# Altium PCB PCB1.PcbDoc
Units mil, origin at the board's own origin, x right, y up, seen from the top; angles counter-clockwise.
Board outline 3937.01 x 3937.01 mil, 2 copper layers (Top Layer, Bottom Layer); 127 components, 79 nets, 406 pads, 54 vias.
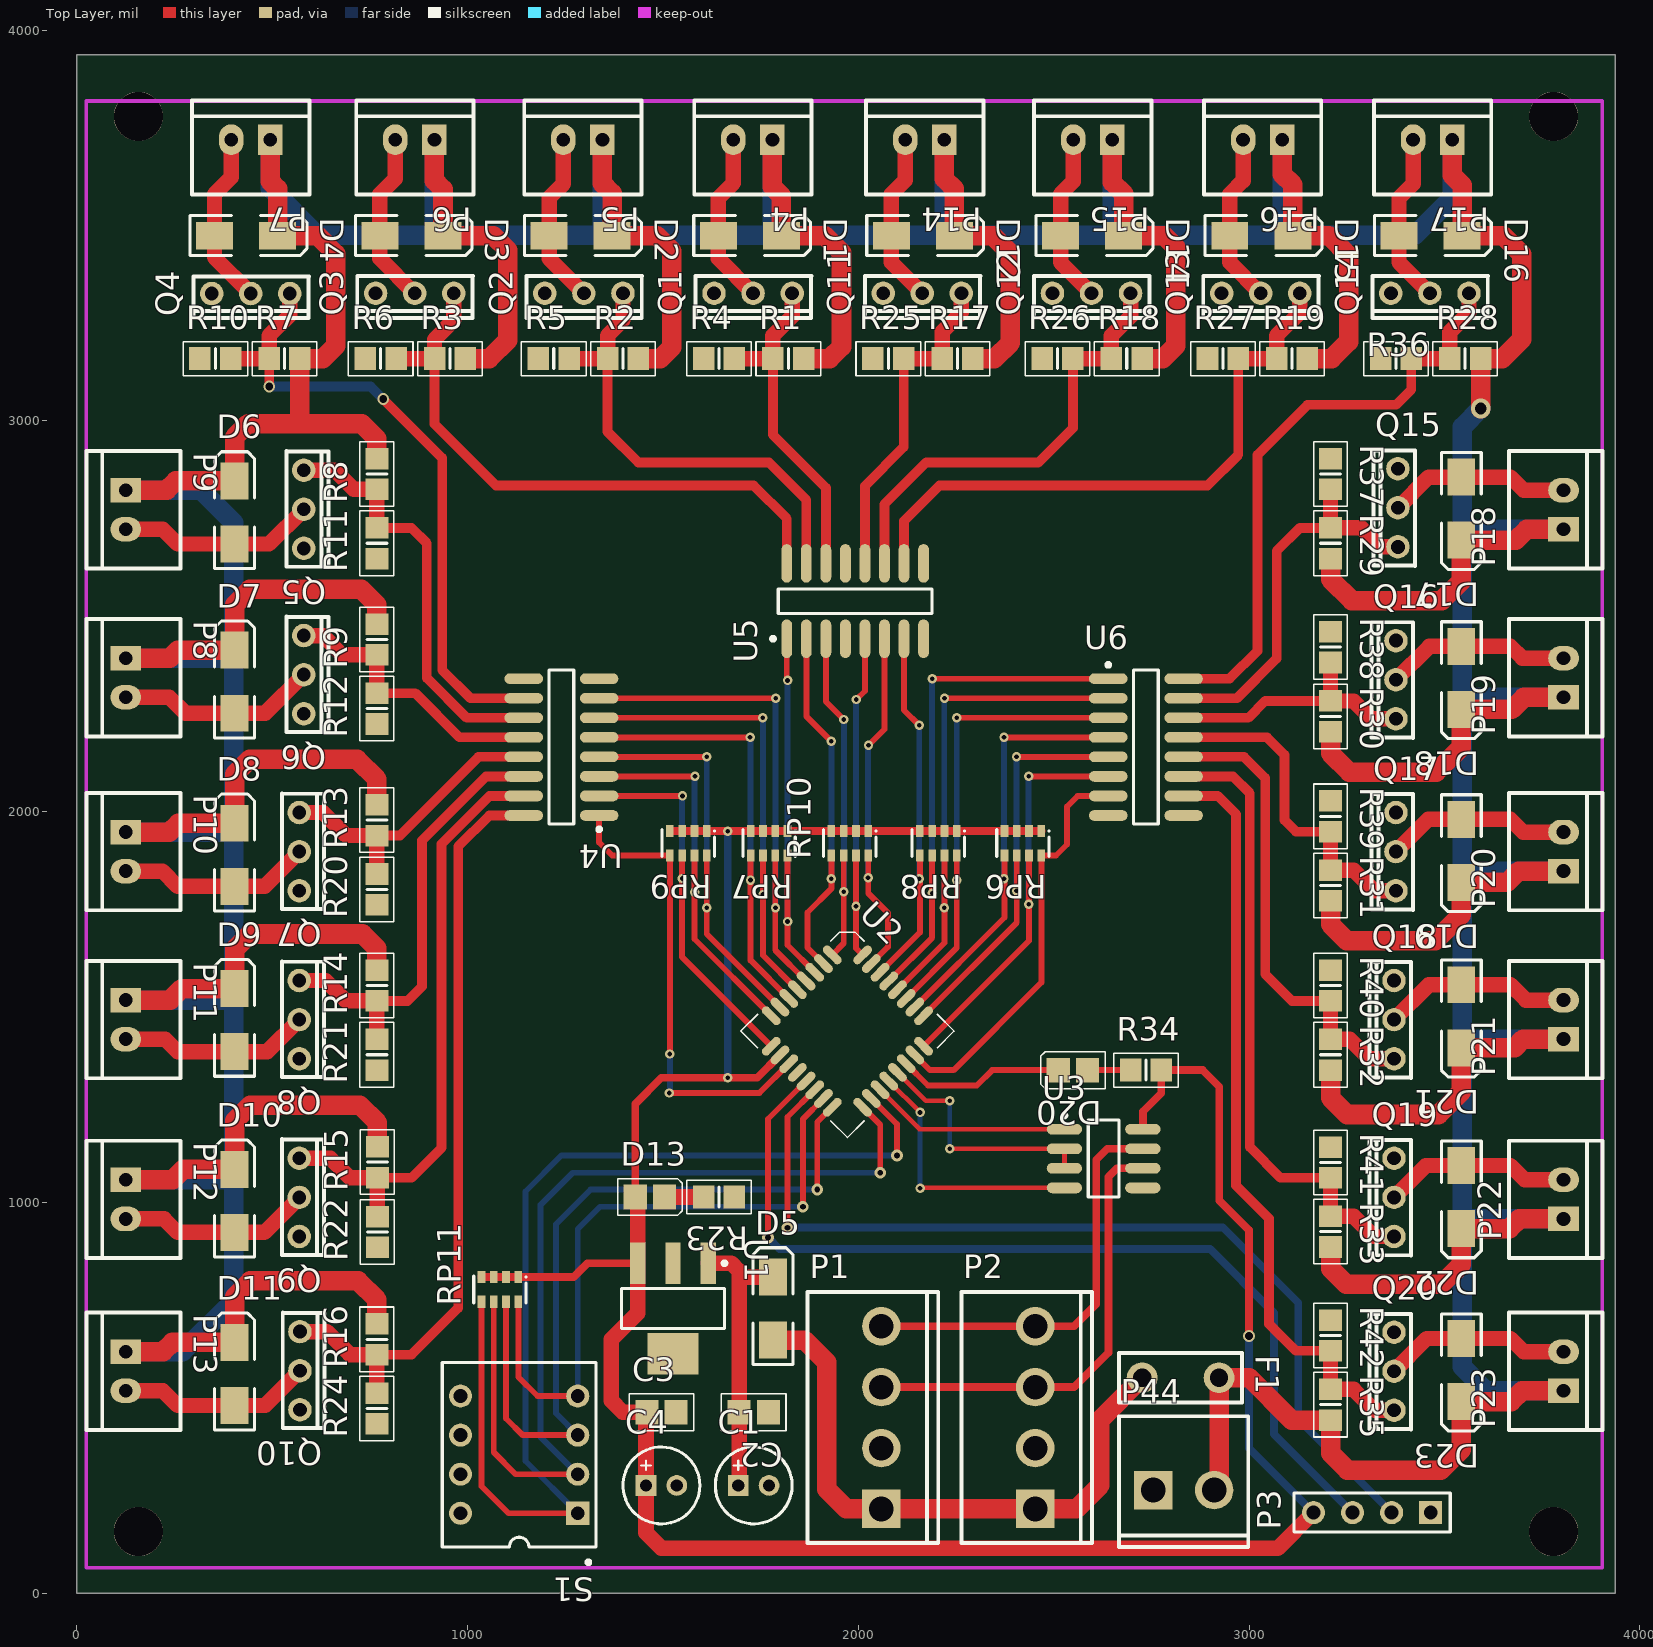
[diagram p0: Top Layer view]
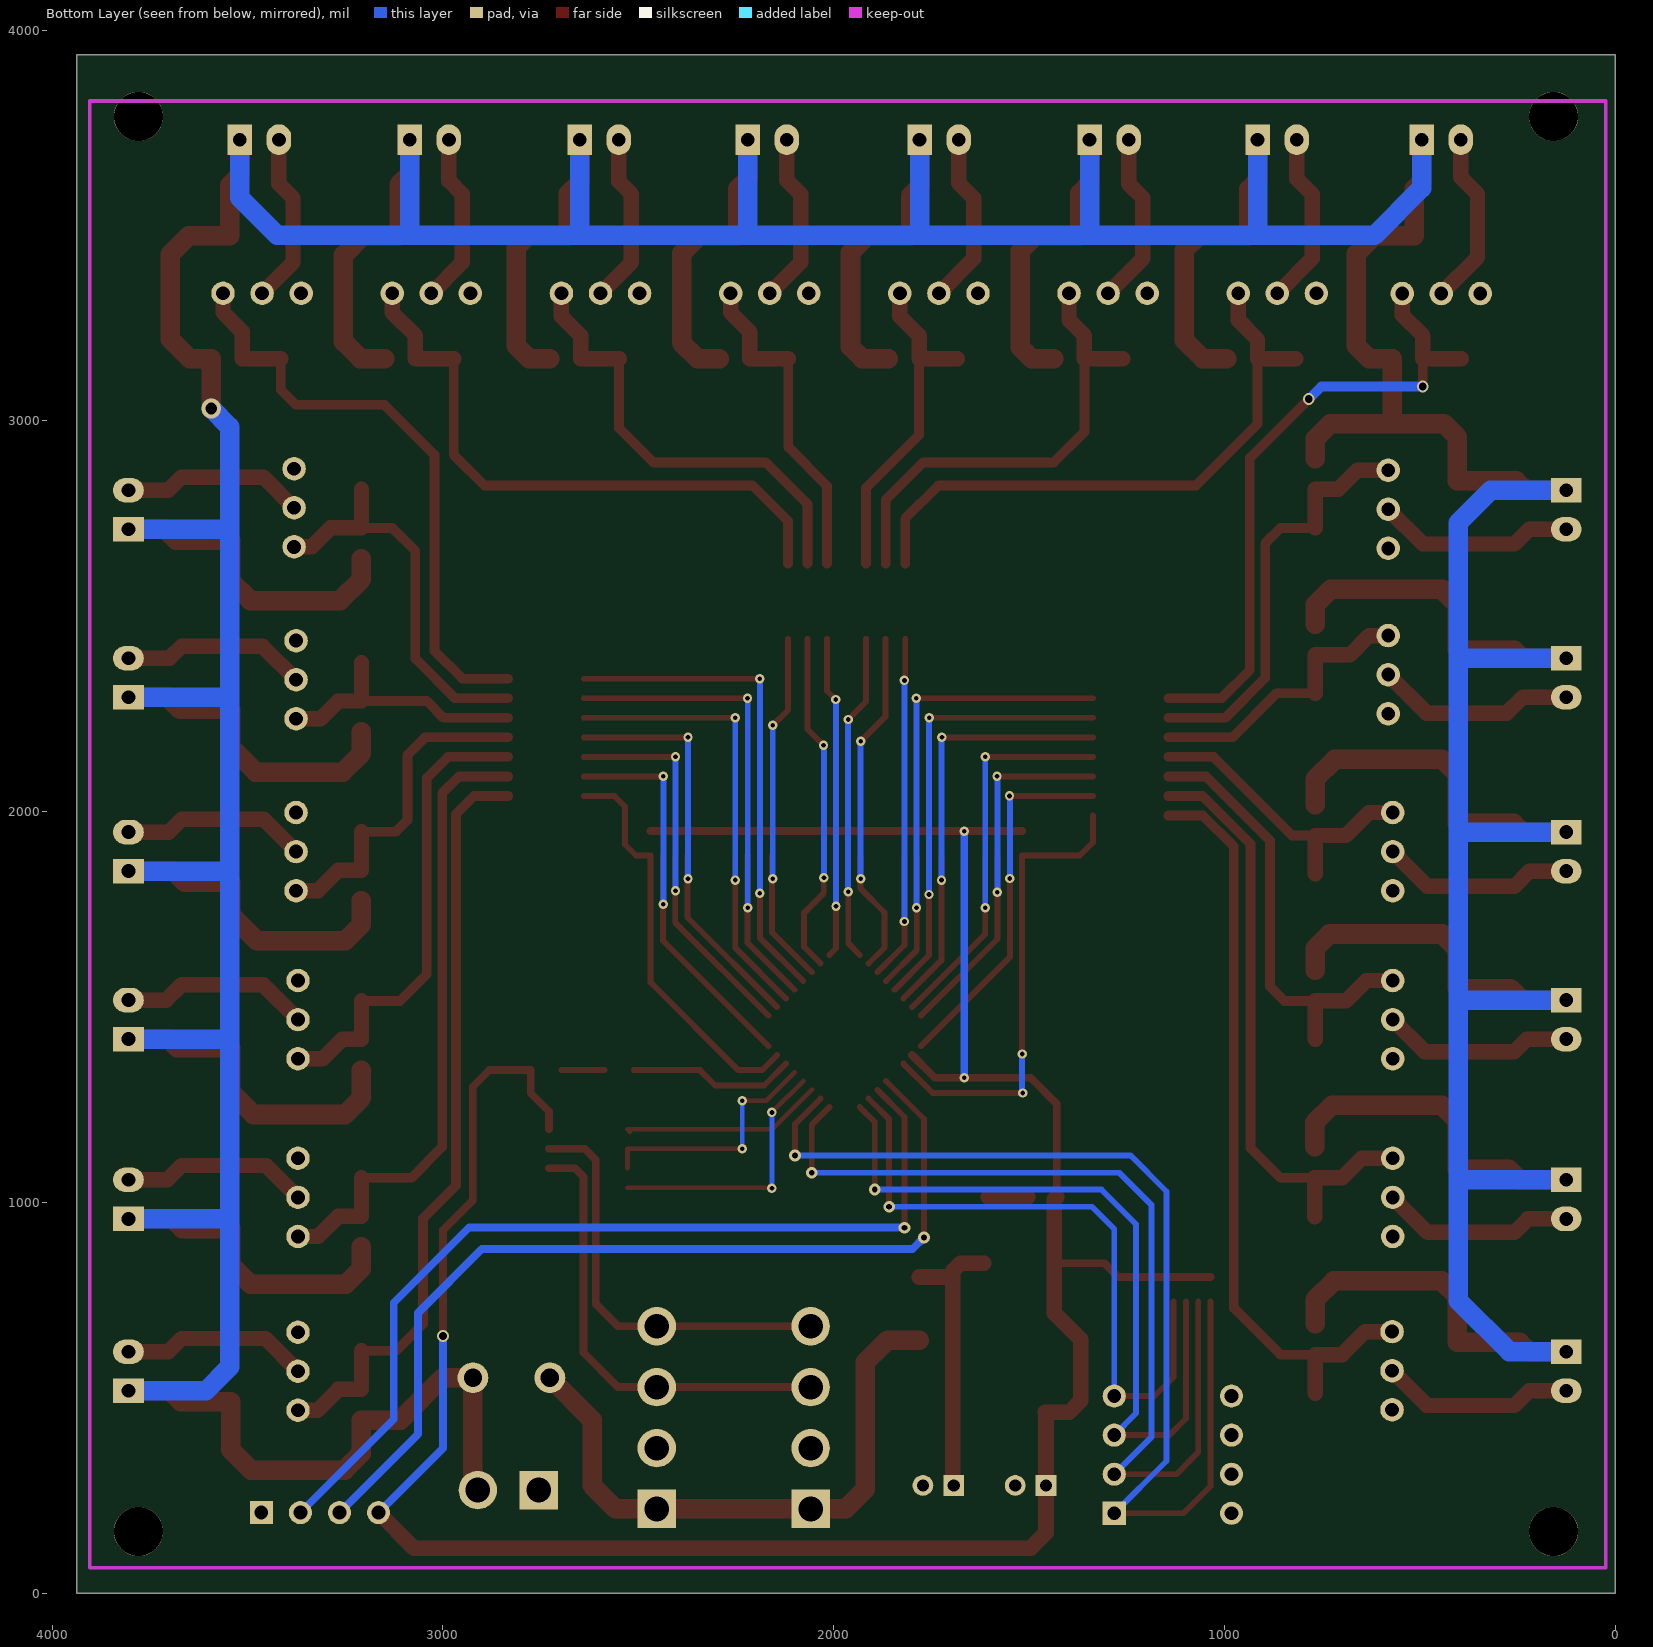
[diagram p1: Bottom Layer view, seen from below]

## Layer stack, top to bottom
Top Solder: solder mask 0.4, Solder Resist, Dk 3.5
Top Layer: signal copper 1.4
Dielectric 1: dielectric 12.6, FR-4, Dk 4.8
Bottom Layer: signal copper 1.4
Bottom Solder: solder mask 0.4, Solder Resist, Dk 3.5

## Board outline
0,0 0,3937.01 3937.01,3937.01 3937.01,0

## Design rules (kind name [scope] priority, off if disabled: settings)
Clearance [All] p1: gap=10
PolygonConnect [All] p1: connectstyle=Relief reliefconductorwidth=10 reliefentries=4 polygonreliefangle="90 Angle" airgapwidth=10
RoutingVias [All] p1: holewidth=28 width=50 viastyle="Through Hole" minholewidth=28 minwidth=50 maxholewidth=28 maxwidth=50
SolderMaskExpansion [All] p1: expansion=4
Width [All] p1: maxlimit=50 minlimit=10 preferedwidth=10
29 further rules are at their usual default settings.

## Components (designator, comment, footprint, x,y, rotation, side; value= is the part's Value field where it differs from the comment)
C1 "Cap Pol2" CAPPR2-5x11.5 1732.28,275.59 r0 top
C2 "0.1uF" CAPC2012M 1732.28,462.6 r180 top
C3 "0.1uF" CAPC2012M 1496.06,462.6 r0 top
C4 "Cap Pol2" CAPPR2-5x11.5 1496.06,275.59 r0 top
D1 "1N4007" DSO-C2/X1.8 1722.44,3474.41 r0 top
D2 "1N4007" DSO-C2/X1.8 1289.37,3474.41 r0 top
D3 "1N4007" DSO-C2/X1.8 856.3,3474.41 r0 top
D4 "1N4007" DSO-C2/X1.8 433.07,3474.41 r0 top
D5 "1N4007" DSO-C2/X1.8 1781.5,728.35 r90 top
D6 "1N4007" DSO-C2/X1.8 403.54,2765.75 r90 top
D7 "1N4007" DSO-C2/X1.8 403.54,2332.68 r90 top
D8 "1N4007" DSO-C2/X1.8 403.54,1889.76 r90 top
D9 "1N4007" DSO-C2/X1.8 403.54,1466.54 r90 top
D10 "1N4007" DSO-C2/X1.8 403.54,1003.94 r90 top
D11 "1N4007" DSO-C2/X1.8 403.54,561.02 r90 top
D12 "1N4007" DSO-C2/X1.8 2165.35,3474.41 r0 top
D13 "LED" LED2012M 1466.54,1013.78 r0 top
D14 "1N4007" DSO-C2/X1.8 2598.43,3474.41 r0 top
D15 "1N4007" DSO-C2/X1.8 3031.5,3474.41 r0 top
D16 "1N4007" DSO-C2/X1.8 3464.57,3474.41 r0 top
D17 "1N4007" DSO-C2/X1.8 3543.31,2775.59 r270 top
D18 "1N4007" DSO-C2/X1.8 3543.31,2342.52 r270 top
D19 "1N4007" DSO-C2/X1.8 3543.31,1899.61 r270 top
D20 "LED" LED2012M 2549.21,1338.58 r180 top
D21 "1N4007" DSO-C2/X1.8 3543.31,1476.38 r270 top
D22 "1N4007" DSO-C2/X1.8 3543.31,1013.78 r270 top
D23 "1N4007" DSO-C2/X1.8 3543.31,570.87 r270 top
F1 "Fuse" SR075 2726.38,551.18 r0 top
P1 "Header 4" VH396-4 2204.72,127.95 r90 top
P2 "Header 4" VH396-4 2598.43,127.95 r90 top
P3 "Header 4" HDR1X4 3465,206 r180 top
P4 "Header 2" XH254-2 1780,3720 r180 top
P5 "Header 2" XH254-2 1345,3720 r180 top
P6 "Header 2" XH254-2 915,3720 r180 top
P7 "Header 2" XH254-2 495,3720 r180 top
P8 "Header 2" XH254-2 125,2392.83 r270 top
P9 "Header 2" XH254-2 125,2822.83 r270 top
P10 "Header 2" XH254-2 125,1947.83 r270 top
P11 "Header 2" XH254-2 125,1517.83 r270 top
P12 "Header 2" XH254-2 125,1057.83 r270 top
P13 "Header 2" XH254-2 125,617.83 r270 top
P14 "Header 2" XH254-2 2220,3720 r180 top
P15 "Header 2" XH254-2 2650,3720 r180 top
P16 "Header 2" XH254-2 3085,3720 r180 top
P17 "Header 2" XH254-2 3520,3720 r180 top
P18 "Header 2" XH254-2 3805,2722.83 r90 top
P19 "Header 2" XH254-2 3805,2292.83 r90 top
P20 "Header 2" XH254-2 3805,1847.83 r90 top
P21 "Header 2" XH254-2 3805,1417.83 r90 top
P22 "Header 2" XH254-2 3805,957.83 r90 top
P23 "Header 2" XH254-2 3805,517.83 r90 top
P44 "Header 2" VH396-2 2667.32,118.11 r0 top
Q1 "NPN" SOT_32 1830.71,3326.77 r180 top
Q2 "NPN" SOT_32 1397.64,3326.77 r180 top
Q3 "NPN" SOT_32 964.57,3326.77 r180 top
Q4 "NPN" SOT_32 545,3326.1 r180 top
Q5 "NPN" SOT_32 580.71,2874.02 r270 top
Q6 "NPN" SOT_32 580.71,2450.79 r270 top
Q7 "NPN" SOT_32 569.21,1997.83 r270 top
Q8 "NPN" SOT_32 569.21,1567.83 r270 top
Q9 "NPN" SOT_32 569.21,1112.83 r270 top
Q10 "NPN" SOT_32 570.87,669.29 r270 top
Q11 "NPN" SOT_32 2263.78,3326.77 r180 top
Q12 "NPN" SOT_32 2696.85,3326.77 r180 top
Q13 "NPN" SOT_32 3129.92,3326.77 r180 top
Q14 "NPN" SOT_32 3562.99,3326.77 r180 top
Q15 "NPN" SOT_32 3381.1,2677.83 r90 top
Q16 "NPN" SOT_32 3376.1,2237.83 r90 top
Q17 "NPN" SOT_32 3376.1,1797.83 r90 top
Q18 "NPN" SOT_32 3371.1,1367.83 r90 top
Q19 "NPN" SOT_32 3371.1,912.83 r90 top
Q20 "NPN" SOT_32 3371.1,467.83 r90 top
R1 "2.2K" RESC2012M 1820.87,3159.45 r0 top
R2 "2.2K" RESC2012M 1397.64,3159.45 r0 top
R3 "2.2K" RESC2012M 954.72,3159.45 r0 top
R4 "100K" RESC2012M 1643.7,3159.45 r0 top
R5 "100K" RESC2012M 1220.47,3159.45 r0 top
R6 "100K" RESC2012M 777.56,3159.45 r0 top
R7 "2.2K" RESC2012M 531.5,3159.45 r0 top
R8 "2.2K" RESC2012M 767.72,2864.17 r90 top
R9 "2.2K" RESC2012M 767.72,2440.94 r90 top
R10 "100K" RESC2012M 354.33,3159.45 r0 top
R11 "100K" RESC2012M 767.72,2687.01 r90 top
R12 "100K" RESC2012M 767.72,2263.78 r90 top
R13 "2.2K" RESC2012M 767.72,1978.35 r90 top
R14 "2.2K" RESC2012M 767.72,1555.12 r90 top
R15 "2.2K" RESC2012M 769,1103 r90 top
R16 "2.2K" RESC2012M 767.72,649.61 r90 top
R17 "2.2K" RESC2012M 2253.94,3159.45 r0 top
R18 "2.2K" RESC2012M 2687.01,3159.45 r0 top
R19 "2.2K" RESC2012M 3110.24,3159.45 r0 top
R20 "100K" RESC2012M 767.72,1801.18 r90 top
R21 "100K" RESC2012M 767.72,1377.95 r90 top
R22 "100K" RESC2012M 769,924 r90 top
R23 "1K" RESC2012M 1643.7,1013.78 r180 top
R24 "100K" RESC2012M 767.72,472.44 r90 top
R25 "100K" RESC2012M 2076.77,3159.45 r0 top
R26 "100K" RESC2012M 2509.84,3159.45 r0 top
R27 "100K" RESC2012M 2933.07,3159.45 r0 top
R28 "2.2K" RESC2012M 3553.15,3159.45 r0 top
R29 "2.2K" RESC2012M 3208.66,2687.01 r270 top
R30 "2.2K" RESC2012M 3208.66,2244.09 r270 top
R31 "2.2K" RESC2012M 3208.66,1811.02 r270 top
R32 "2.2K" RESC2012M 3208.66,1377.95 r270 top
R33 "2.2K" RESC2012M 3208.66,925.2 r270 top
R34 "1K" RESC2012M 2736.22,1338.58 r0 top
R35 "2.2K" RESC2012M 3208.66,482.28 r270 top
R36 "100K" RESC2012M 3375.98,3159.45 r0 top
R37 "100K" RESC2012M 3208.66,2864.17 r270 top
R38 "100K" RESC2012M 3208.66,2421.26 r270 top
R39 "100K" RESC2012M 3208.66,1988.19 r270 top
R40 "100K" RESC2012M 3208.66,1555.12 r270 top
R41 "100K" RESC2012M 3208.66,1102.36 r270 top
R42 "100K" RESC2012M 3208.66,659.45 r270 top
RP6 "10K" EXB38V 2421.26,1919.29 r180 top
RP7 "10K" EXB38V 1771.65,1919.29 r180 top
RP8 "10K" EXB38V 2204.72,1919.29 r180 top
RP9 "10K" EXB38V 1564.96,1919.29 r180 top
RP10 "10K" EXB38V 1978.35,1919.29 r180 top
RP11 "10K" EXB38V 1082.68,777.56 r180 top
S1 "SW DIP-4" SWITCH-8 1131.89,354.33 r180 top
U1 "LM7805" SOT223-4M 1525.59,728.35 r270 top
U2 "STC15W408S_LQFP32" LQFP32 1968.5,1456.69 r315 top
U3 "MAX485ESA" SO8_M 2627.95,1112.2 r0 top
U4 "ULN2003" SO16_M 1240.16,2165.35 r180 top
U5 "ULN2003" SO16_M 1992,2539 r90 top
U6 "ULN2003" SO16_M 2736.22,2165.35 r0 top

## Footprints (in the part's own frame and the unit in brackets; to place one, negate y for a bottom-side part, rotate by r counter-clockwise, add the part's x,y. Pads: shape width x height; smd on the part's side, far side on the other; paste and mask are expansions set on the pad)
CAPC2012M [mm] "Chip Capacitor, Body 2.0x1.3mm, IPC Low Density"
  rect 1.5x1.6 smd: 1(-0.95,0) 2(0.95,0)
  silkscreen extent -2.1,-1.2 2.1,1.2, body extent -1.1,-0.72 1.1,0.72, height 1.1
CAPPR2-5x11.5 [mm] "Capacitor, Electrolytic, Radial; Body 5 x 11.5 mm (Dia.xH typ); Pin Spacing 2 mm (typ)"
  rect 1.35x1.35 hole 0.8: 1(-1,0)
  round 1.35 hole 0.8: 2(1,0)
  silkscreen extent -2.5,-2.5 2.5,2.5
DSO-C2/X1.8 [mm] "DO-214-AC/SMA; 2 C-Bend Leads; Body 5 x 2.7 mm, inc. leads (LxW)"
  rect 2.4x1.8 smd: 1(-2.05,0) 2(2.05,0)
  silkscreen extent -3.65,-1.3 3.95,1.3
EXB38V [mm] "Chip Resistor Array, (0603x4); SM; 8 Leads; Body 3.40 x 1.75 mm (LxW max)"
  rect 0.5x0.8 smd: 1(-1.2,-0.8) 2(-0.4,-0.8) 3(0.4,-0.8) 4(1.2,-0.8) 5(1.2,0.8) 6(0.4,0.8) 7(-0.4,0.8) 8(-1.2,0.8)
  silkscreen extent -1.75,-0.87 1.7,0.87
HDR1X4 [mm] "Connector; Header; 4 Position"
  rect 1.5x1.5 hole 0.9: 1(0,0)
  round 1.5 hole 0.9: 2(2.54,0) 3(5.08,0) 4(7.62,0)
  silkscreen extent -1.27,-1.27 8.89,1.27
LED2012M [mm] "Chip LED, Body 2.0x1.3mm, IPC Low Density"
  rect 1.5x1.6 smd: 1(-0.95,0) 2(0.95,0)
  silkscreen extent -2.1,-1.2 2.1,1.2, body extent -1.1,-0.72 1.1,0.72, height 1.1
LQFP32 [mm]
  oval 1.5x0.55 smd: 1(-3.81,2.54) 2(-3.81,1.74) 3(-3.81,0.94) 4(-3.81,0.14) 5(-3.81,-0.66) 6(-3.81,-1.46) 7(-3.81,-2.26) 8(-3.81,-3.06) 17(4.59,-3.06) 18(4.59,-2.26) 19(4.59,-1.46) 20(4.59,-0.66) 21(4.59,0.14) 22(4.59,0.94) 23(4.59,1.74) 24(4.59,2.54)
  oval 0.55x1.5 smd: 9(-2.41,-4.46) 10(-1.61,-4.46) 11(-0.81,-4.46) 12(-0.01,-4.46) 13(0.79,-4.46) 14(1.59,-4.46) 15(2.39,-4.46) 16(3.19,-4.46) 25(3.19,3.94) 26(2.39,3.94) 27(1.59,3.94) 28(0.79,3.94) 29(-0.01,3.94) 30(-0.81,3.94) 31(-1.61,3.94) 32(-2.41,3.94)
  silkscreen extent -4.51,-5.16 5.29,4.64
RESC2012M [mm] "Chip Resistor, Body 2.0x1.3mm, IPC Low Density"
  rect 1.4x1.5 smd: 1(-1,0) 2(1,0)
  silkscreen extent -2.1,-1.1 2.1,1.1, body extent -1.07,-0.7 1.07,0.7, height 0.65
SO8_M [mm] "SOIC, 8-Leads, Body 4.9x3.9mm, Pitch 1.27mm, IPC Low Density"
  oval 2.3x0.7 smd: 1(-2.55,1.905) 2(-2.55,0.635) 3(-2.55,-0.635) 4(-2.55,-1.905) 5(2.55,-1.905) 6(2.55,-0.635) 7(2.55,0.635) 8(2.55,1.905)
  silkscreen extent -2.67,-2.5 1,2.93, body extent -2,-2.5 2,2.5, height 1.75
SO16_M [mm] "SOIC, 16-Leads, Body 9.9x3.9mm, Pitch 1.27mm, IPC Low Density"
  oval 2.5x0.7 smd: 1(-2.45,4.445) 2(-2.45,3.175) 3(-2.45,1.905) 4(-2.45,0.635) 5(-2.45,-0.635) 6(-2.45,-1.905) 7(-2.45,-3.175) 8(-2.45,-4.445) 9(2.45,-4.445) 10(2.45,-3.175) 11(2.45,-1.905) 12(2.45,-0.635) 13(2.45,0.635) 14(2.45,1.905) 15(2.45,3.175) 16(2.45,4.445)
  silkscreen extent -2.58,-5 0.8,5.47, body extent -2,-5 2,5, height 1.75
SOT223-4M [mm] "SOT223/SC73, 4-Leads, Body 6.5x3.5mm, Pitch 2.3mm, Lead Span 7mm, IPC Low Density"
  rect 2.7x1 smd: 1(-2.95,2.3) 2(-2.95,0) 3(-2.95,-2.3)
  rect 2.7x3.3 smd: 4(2.95,0)
  silkscreen extent -3.07,-3.35 1.3,3.48, body extent -1.85,-3.35 1.85,3.35, height 1.8
SOT_32 [mil]
  round 60 hole 35.43: 1(0,0) 2(200,0) 3(100,0)
  silkscreen extent -49,-44 247,63
SR075 [mm]
  round 2 hole 1.2: 1(0,0) 2(5,0)
  silkscreen extent -1.5,-1.6 6.5,1.6
SWITCH-8 [mm] "DIP; 8 Leads; Row Spacing 7.62 mm; Pitch 2.54 mm"
  rect 1.5x1.5 hole 0.9: 1(-3.81,3.81)
  round 1.5 hole 0.9: 2(-3.81,1.27) 3(-3.81,-1.27) 4(-3.81,-3.81) 5(3.81,-3.81) 6(3.81,-1.27) 7(3.81,1.27) 8(3.81,3.81)
  silkscreen extent -5,-6 5,7.12, body extent -5,-6 5,6, height 6.2
VH396-2 [mm]
  rect 2.5x2.5 hole 1.6: 1(2.22,3.7)
  round 2.5 hole 1.6: 2(6.18,3.7)
  silkscreen extent 0,0 8.4,8.5
VH396-4 [mm]
  rect 2.5x2.5 hole 1.6: 1(2.22,3.7)
  round 2.5 hole 1.6: 2(6.18,3.7) 3(10.14,3.7) 4(14.1,3.7)
  silkscreen extent 0,0 16.32,8.5
XH254-2 [mm]
  rect 1.6x2 hole 0.9: 1(0,0)
  oval 1.6x2 hole 0.9: 2(2.54,0)
  silkscreen extent -2.54,-2.54 5.08,3.56

## Part data
C1 C4: "Polarized Capacitor (22uf-47uf)"
C2 C3: library part Cap, "Capacitor"
D1 D2 D3 D4 D5 D6 D7 D8 D9 D10 D11 D12 D14 D15 D16 D17 D18 D19 D21 D22 D23: library part Diode, "Default Diode"
D13 D20: "Typical INFRARED GaAs LED"
P1 P2 P3: "Header, 4-Pin"
P4 P5 P6 P7 P8 P9 P10 P11 P12 P13 P14 P15 P16 P17 P18 P19 P20 P21 P22 P23 P44: "Header, 2-Pin"
Q1 Q2 Q3 Q4 Q5 Q6 Q7 Q8 Q9 Q10 Q11 Q12 Q13 Q14 Q15 Q16 Q17 Q18 Q19 Q20: "NPN Bipolar Transistor"
R1 R2 R3 R4 R5 R6 R7 R8 R9 R10 R11 R12 R13 R14 R15 R16 R17 R18 R19 R20 R21 R22 R23 R24 R25 R26 R27 R28 R29 R30 R31 R32 R33 R34 R35 R36 R37 R38 R39 R40 R41 R42: library part Res, "Resistor"
RP6 RP7 RP8 RP9 RP10 RP11: library part "Res Pack"
S1: "DIP Switch, 4 Position, SPST"
U3: "Low-Power, Slew-Rate-Limited RS-485/RS-422 Transceiver"
U4 U5 U6: "Seven Darlington Array"

## Free pads (board coordinates)
  round 125.98 hole 125.98: 0(157.48,157.48) 0(157.48,3779.53) 0(3779.53,157.48) 0(3779.53,3779.53)

## Via types
v1: diameter 24, hole 12, Top Layer to Bottom Layer, 44 vias
v2: diameter 30, hole 15, Top Layer to Bottom Layer, 6 vias
v3: diameter 30, hole 20, Top Layer to Bottom Layer, 3 vias
v4: diameter 50, hole 30, Top Layer to Bottom Layer, 1 vias

## Nets (pads, with @x,y where several pads share a name; then routed paths per layer and width w, separated by ;. In a path a pad name is that pad's centre, name@x,y a point inside that pad or via, vN(x,y) a via of type N, cw(c..) or ccw(c..) an arc to the next point about the centre after c; other vN are vias at no path point)
24V: D5.1 F1.1 P1.1 P2.1 | length 1551.3
  Top Layer w50: D5.1 1862.2,647.64 1919.29,590.55 1919.29,265.75 1969.69,215.35 P1.1 P2.1 2557.87,215.35 2618.11,275.59 2618.11,442.91 F1.1
24V_OUT: D1.2 D2.2 D3.2 D4.2 D6.2 D7.2 D8.2 D9.2 D10.2 D11.2 D12.2 D14.2 D15.2 D16.2 D17.2 D18.2 D19.2 D21.2 D22.2 D23.2 F1.2 P4.1 P5.1 P6.1 P7.1 P8.1 P9.1 P10.1 P11.1 P12.1 P13.1 P14.1 P15.1 P16.1 P17.1 P18.1 P19.1 P20.1 P21.1 P22.1 P23.1 P44.2 R1.2 R2.2 R3.2 R7.2 R8.2 R9.2 R13.2 R14.2 R15.2 R16.2 R17.2 R18.2 R19.2 R28.2 R29.2 R30.2 R31.2 R32.2 R33.2 R35.2 | length 29752.5
  Top Layer w50: P13.1 220.83,617.83 244.73,641.73 D11.2 403.54,758.54 444,799 720,799 767.72,751.28 R16.2 ; P12.1 244.83,1057.83 271.65,1084.65 D10.2 403.54,1208.54 444,1249 724,1249 769,1204 R15.2 ; P11.1 238.83,1517.83 268.24,1547.24 D9.2 403.54,1647.54 443,1687 731,1687 767.72,1650.28 R14.2 ; P10.1 236.83,1947.83 259.47,1970.47 D8.2 403.54,2095.54 442,2134 717,2134 767.72,2083.28 R13.2 ; P8.1 237.83,2392.83 258.39,2413.39 D7.2 403.54,2529.54 443,2569 728,2569 767.72,2529.28 R9.2 ; P9.1 229.83,2822.83 253.46,2846.46 D6.2 403.54,2958.54 438,2993 566,2993 ; P7.1 495,3613 513.78,3594.22 D4.2 615.59,3474.41 662,3428 662,3192 629.45,3159.45 R7.2 570.87,2997.87 566,2993 ; R8.2 767.72,2954.28 729,2993 566,2993 ; P6.1 915,3615 937.01,3592.99 D3.2 1065.59,3474.41 1103,3437 1103,3207 1055.45,3159.45 R3.2 ; P5.1 1345,3608 1370.08,3582.92 D2.2 1483.59,3474.41 1523,3435 1523,3189 1493.45,3159.45 R2.2 ; P4.1 1780,3599 1803.15,3575.85 D1.2 1913.59,3474.41 1957,3431 1957,3190 1926.45,3159.45 R1.2 ; P14.1 2220,3620 2246.06,3593.94 D12.2 2343.59,3474.41 2389,3429 2389,3200 2348.45,3159.45 R17.2 ; P15.1 2650,3611 2679.13,3581.87 D14.2 2782.59,3474.41 2812,3445 2812,3192 2779.45,3159.45 R18.2 ; P44.2 2923.23,276.38 F1.2 3000.82,551.18 3109.09,442.91 R35.2 3208.66,358.34 3252,315 3491,315 3543.31,367.31 D23.2 3671.16,490.16 3698.83,517.83 P23.1 ; P16.1 3085,3632 3112.2,3604.8 D15.2 3204.59,3474.41 3255,3424 3255,3203 3211.45,3159.45 R19.2 ; R33.2 3208.66,830.34 3249,790 3492,790 3543.31,841.31 D22.2 3667.07,933.07 3691.83,957.83 P22.1 ; R32.2 3208.66,1267.34 3251,1225 3485,1225 3543.31,1283.31 D21.2 3679.67,1395.67 3701.83,1417.83 P21.1 ; R31.2 3208.66,1711.34 3250,1670 3477,1670 3543.31,1736.31 D19.2 3660.9,1818.9 3689.83,1847.83 P20.1 ; R30.2 3208.66,2149.34 3257,2101 3479,2101 3543.31,2165.31 D18.2 3672.81,2261.81 3703.83,2292.83 P19.1 ; R29.2 3208.66,2594.34 3263,2540 3493,2540 3543.31,2590.31 D17.2 3682.88,2694.88 3710.83,2722.83 P18.1 ; P17.1 3520,3629 3545.28,3603.72 D16.2 3650.59,3474.41 3698,3427 3698,3209 3648.45,3159.45 R28.2 3592.52,3032.48 v4(3593,3032)
  Bottom Layer w50: P13.1@120,617.83 270.83,617.83 401,748 401,2740 318.17,2822.83 P9.1@120,2822.83 ; P11.1@120,1517.83 393.83,1517.83 ; P10.1@120,1947.83 399.83,1947.83 ; P8.1@120,2392.83 400.17,2392.83 ; P12.1 396.17,1057.83 ; P7.1 495,3596 616,3475 2220,3475 ; 915,3481 P6.1 ; 1345,3476 P5.1 ; 1780,3476 P4.1 ; P14.1 2220,3475 ; 2650,3477 P15.1 ; 3085,3476 P16.1 ; P17.1 3520,3571 3424,3475 2220,3475 ; 3546.17,2292.83 P19.1 ; 3547.83,1417.83 P21.1 ; 3548.83,1847.83 P20.1 ; 3551.83,957.83 P22.1 ; 3554.17,2722.83 P18.1 ; v4(3593,3032) 3546,2985 3546,579 3607.17,517.83 P23.1
A: P1.3 P2.3 U3.6 | length 1164.9
  Top Layer w20: P1.3 P2.3 2552.17,527.17 2640,615 2640,1065 2662.2,1087.2 U3.6
ADDR1: RP11.5 S1.1 U2.18 | length 2789
  Top Layer w15: RP11.5 1035.43,273.62 1104.72,204.33 S1.1 ; U2.18 2099,1200.36 v2(2099,1120)
  Bottom Layer w15: S1.1 1148,338.22 1148,1028 1240,1120 v2(2099,1120)
ADDR2: RP11.6 S1.2 U2.17 | length 2442.2
  Top Layer w15: RP11.6 1066.93,360.24 1122.83,304.33 S1.2 ; U2.17 2056,1198.82 v2(2056,1076)
  Bottom Layer w15: S1.2 1187,399.22 1187,994 1269,1076 v2(2056,1076)
ADDR3: RP11.7 S1.3 U2.16 | length 1995.5
  Top Layer w15: RP11.7 1098.43,446.85 1140.94,404.33 S1.3 ; v2(1895,1033) 1895,1205.58 U2.16
  Bottom Layer w15: S1.3 1226,460.22 1226,944 1315,1033 v2(1895,1033)
ADDR4: RP11.8 S1.4 U2.15 | length 1691.3
  Top Layer w15: RP11.8 1129.92,553.15 1178.74,504.33 S1.4 ; v2(1858,989) 1858,1213.12 U2.15
  Bottom Layer w15: S1.4 1281.89,931.89 1339,989 v2(1858,989)
B: P1.4 P2.4 U3.7 | length 1073.6
  Top Layer w20: P1.4 P2.4 2552.07,683.07 2609,740 2609,1109 2637.2,1137.2 U3.7
GND: C1.2 C2.1 C3.2 C4.2 P1.2 P2.2 P3.1 P44.1 Q1.2 Q2.2 Q3.2 Q4.2 Q5.2 Q6.2 Q7.2 Q8.2 Q9.2 Q10.2 Q11.2 Q12.2 Q13.2 Q14.2 Q15.2 Q16.2 Q17.2 Q18.2 Q19.2 Q20.2 R4.1 R5.1 R6.1 R10.1 R11.1 R12.1 R20.1 R21.1 R22.1 R23.1 R24.1 R25.1 R26.1 R27.1 R36.1 R37.1 R38.1 R39.1 R40.1 R41.1 R42.1 S1.5 S1.6 S1.7 S1.8 U1.2 U1.4 U2.12 U3.5 U4.8 U5.8 U6.8
LC1: RP10.6 U2.1 U5.3 | length 933.1
  Top Layer w15: U5.3 1917,2282 v1(1963,2236) ; U2.1 1962.6,1662.92 RP10.6
  Bottom Layer w15: v1(1963,1795) v1(1963,2236)
LC2: RP10.5 U2.2 U5.2 | length 959.8
  Top Layer w15: U5.2 1867,2244 v1(1931,2180) ; U2.2 1870.08,1652 1870.08,1742.13 1931.1,1803.15 RP10.5
  Bottom Layer w15: v1(1931,1828) v1(1931,2180)
LC3: RP7.8 U2.3 U5.1 | length 1052.1
  Top Layer w15: U5.1 1817,2338 v1(1819,2336) ; RP7.8 1818.9,1658.64 U2.3
  Bottom Layer w15: v1(1819,1719) v1(1819,2336)
LC4: RP7.7 U2.4 U4.7 | length 1343.2
  Top Layer w15: U4.7 v1(1789,2290.35) ; RP7.7 1787.4,1645.59 U2.4
  Bottom Layer w15: v1(1788,1754) v1@1788,2291
LC5: RP7.6 U2.5 U4.6 | length 1250
  Top Layer w15: U4.6 v1(1755.71,2240.35) ; RP7.6 1755.91,1632.54 U2.5
  Bottom Layer w15: v1(1756,1788) v1@1756,2239
LC6: RP7.5 U2.6 U4.5 | length 1156.4
  Top Layer w15: U4.5 v1(1723,2190.35) ; RP7.5 1724.41,1619.5 U2.6
  Bottom Layer w15: v1(1724,1825) v1@1724,2189
LC7: RP9.8 U2.7 U4.4 | length 1126.9
  Top Layer w15: U4.4 v1(1612,2140.35) ; RP9.8 1612.2,1687.16 U2.7
  Bottom Layer w15: v1(1612,1754) v1@1612,2140
LC8: RP9.7 U2.8 U4.3 | length 1033
  Top Layer w15: U4.3 v1(1582,2090.35) ; RP9.7 1580.71,1674.11 U2.8
  Bottom Layer w15: v1(1581,1794) v1@1581,2090
LC9: RP9.6 U2.9 U4.2 | length 1008
  Top Layer w15: U4.2 v1(1550,2040.35) ; RP9.6 1549.21,1627.66 U2.9
  Bottom Layer w15: v1(1549,1829) v1@1549,2041
LC10: RP9.5 U2.11 U4.1 | length 1209.5
  Top Layer w15: U4.1 1336.61,1921.26 1370.08,1887.8 RP9.5 v1(1517.72,1379.92) ; v1(1516,1280) 1746.71,1280 U2.11
  Bottom Layer w15: v1(1516,1280) 1517.72,1281.72 v1(1517.72,1379.92)
LC11: RP10.7 U2.32 U5.5 | length 955
  Top Layer w15: RP10.7 1994.09,1650.47 U2.32 ; v1(1995,2287) 2017,2309 U5.5
  Bottom Layer w15: v1(1994,1758) v1@1994,2287
LC12: RP10.8 U2.31 U5.6 | length 943.4
  Top Layer w15: RP10.8 2025.59,1791.19 2075.71,1741.07 2075.71,1653.54 U2.31 ; v1(2026,2170) 2067,2211 U5.6
  Bottom Layer w15: v1(2025,1831) v1@2025,2170
LC13: RP8.5 U2.30 U5.7 | length 971.7
  Top Layer w15: U2.30 2157.48,1690.77 RP8.5 ; U5.7 2117,2260 v1(2156,2221)
  Bottom Layer w15: v1(2156,1828) v1(2156,2221)
LC14: RP8.6 U2.29 U6.1 | length 1367.3
  Top Layer w15: U2.29 2188.98,1677.72 RP8.6 ; v1(2189,2340.35) U6.1
  Bottom Layer w15: v1(2189,1791) v1(2189,2340.35)
LC15: RP8.7 U2.28 U6.2 | length 1349.4
  Top Layer w15: U2.28 2220.47,1664.68 RP8.7 ; v1(2220.65,2290.35) U6.2
  Bottom Layer w15: v1(2220,1754) v1@2220,2291
LC16: RP8.8 U2.27 U6.3 | length 1222.1
  Top Layer w15: U2.27 2251.97,1651.63 RP8.8 ; v1(2252,2240.35) U6.3
  Bottom Layer w15: v1(2252,1825) v1@2252,2240
LC17: RP6.5 U2.26 U6.4 | length 1111.7
  Top Layer w15: U2.26 2374.02,1729.13 RP6.5 ; v1(2373,2190.35) U6.4
  Bottom Layer w15: v1(2373,1828) v1@2373,2190
LC18: RP6.6 U2.25 U6.5 | length 1085.8
  Top Layer w15: U2.25 2405.51,1716.09 RP6.6 ; v1(2405,2140.35) U6.5
  Bottom Layer w15: v1(2405,1798) v1@2405,2140
LC19: RP6.7 U2.24 U6.6 | length 1130.8
  Top Layer w15: U2.24 2437.01,1669.64 RP6.7 ; v1(2436,2090.35) U6.6
  Bottom Layer w15: v1(2436,1763) v1@2436,2090
LC20: RP6.8 U2.23 U6.7 | length 1048.9
  Top Layer w15: U2.23 2183.49,1338.58 2244.09,1338.58 2468.5,1562.99 RP6.8 2505.8,1887.8 2534,1916 2534,2013 2561.35,2040.35 U6.7
LC_DRV1: Q1.1 R1.1 R4.2 U5.14 | length 866.3
  Top Layer w25: R1.1 1781.5,2964.5 1917,2829 U5.14
  Top Layer w39.37: R4.2 R1.1 1781.5,3218.5 1830.71,3267.72 Q1.1
LC_DRV2: Q2.1 R2.1 R5.2 U5.15 | length 1212.6
  Top Layer w25: R2.1 1358.27,2972.44 1437.01,2893.7 1771.3,2893.7 1867,2798 U5.15
  Top Layer w39.37: R5.2 R2.1 1358.27,3218.5 1397.64,3257.87 Q2.1
LC_DRV3: Q3.1 R3.1 R6.2 U5.16 | length 1569.9
  Top Layer w25: R3.1 915.35,2992.13 1072.83,2834.65 1732.28,2834.65 1817,2749.93 U5.16
  Top Layer w39.37: R6.2 R3.1 915.35,3208.66 964.57,3257.87 Q3.1
LC_DRV4: Q4.1 R7.1 R10.2 U4.10 | length 1658.3
  Top Layer w25: v3(492.13,3088) R7.1 ; v3(784,3056) 935.04,2904.96 935.04,2362.2 1006.89,2290.35 U4.10
  Top Layer w39.37: R10.2 R7.1 492.13,3218.5 545,3271.38 Q4.1
  Bottom Layer w25: v3(492.13,3088) 752,3088 v3(784,3056)
LC_DRV5: Q5.1 R8.1 R11.2 U4.11 | length 1084.9
  Top Layer w25: R11.2 856.3,2726.38 895.67,2687.01 895.67,2342.52 997.83,2240.35 U4.11
  Top Layer w39.37: Q5.1 659.45,2874.02 708.66,2824.8 R8.1 R11.2
LC_DRV6: Q6.1 R9.1 R12.2 U4.12 | length 728.5
  Top Layer w25: R12.2 866.14,2303.15 978.94,2190.35 U4.12
  Top Layer w39.37: Q6.1 629.92,2450.79 679.13,2401.57 R9.1 R12.2
LC_DRV7: Q7.1 R13.1 R20.2 U4.13 | length 780.7
  Top Layer w25: R13.1 826.77,1938.98 1028.15,2140.35 U4.13
  Top Layer w39.37: Q7.1 630.12,1997.83 688.98,1938.98 R13.1 R20.2
LC_DRV8: Q8.1 R14.1 R21.2 U4.14 | length 1151.6
  Top Layer w25: R14.1 846.46,1515.75 883,1552.29 883,1926.31 1047.05,2090.35 U4.14
  Top Layer w39.37: Q8.1 636.89,1567.83 688.98,1515.75 R14.1 R21.2
LC_DRV9: Q9.1 R15.1 R22.2 U4.15 | length 1556.2
  Top Layer w25: R15.1 769.64,1062.99 856.3,1062.99 933,1139.69 933,1917.25 1056.1,2040.35 U4.15
  Top Layer w39.37: Q9.1 648.98,1112.83 698.82,1062.99 768.36,1062.99 R15.1 R22.2
LC_DRV10: Q10.1 R16.1 R24.2 U4.16 | length 1959.1
  Top Layer w25: R16.1 856.3,610.24 976,729.94 976,1910.75 1055.6,1990.35 U4.16
  Top Layer w39.37: Q10.1 639.76,669.29 698.82,610.24 R16.1 R24.2
LC_DRV11: Q11.1 R17.1 R25.2 U5.12 | length 851.2
  Top Layer w25: U5.12 2017,2833.93 2116.14,2933.07 R25.2
  Top Layer w39.37: R25.2 R17.1 2214.57,3228.35 2263.78,3277.56 Q11.1
LC_DRV12: Q12.1 R18.1 R26.2 U5.11 | length 1177.9
  Top Layer w25: U5.11 2067,2787 2173.7,2893.7 2460.63,2893.7 2549.21,2982.28 R26.2
  Top Layer w39.37: R26.2 R18.1 2647.64,3218.5 2696.85,3267.72 Q12.1
LC_DRV13: Q13.1 R19.1 R27.2 U5.10 | length 1570.4
  Top Layer w25: U5.10 2117,2744 2207.65,2834.65 2893.7,2834.65 2972.44,2913.39 R27.2
  Top Layer w39.37: R27.2 R19.1 3070.87,3218.5 3129.92,3277.56 Q13.1
LC_DRV14: Q14.1 R28.1 R36.2 U6.16 | length 1548.3
  Top Layer w25: U6.16 2950.59,2340.35 3021.65,2411.42 3021.65,2913.39 3149.61,3041.34 3375.98,3041.34 3415.35,3080.71 R36.2
  Top Layer w39.37: R36.2 R28.1 3513.78,3228.35 3562.99,3277.56 Q14.1
LC_DRV15: Q15.1 R29.1 R37.2 U6.15 | length 1009
  Top Layer w25: U6.15 2969.49,2290.35 3070.87,2391.73 3070.87,2667.32 3129.92,2726.38 R29.1
  Top Layer w39.37: R37.2 R29.1 3287.4,2726.38 3335.94,2677.83 Q15.1
LC_DRV16: Q16.1 R30.1 R38.2 U6.14 | length 678.6
  Top Layer w25: U6.14 2998.23,2240.35 3041.34,2283.46 R30.1
  Top Layer w39.37: R38.2 R30.1 3267.72,2283.46 3313.35,2237.83 Q16.1
LC_DRV17: Q17.1 R31.1 R39.2 U6.13 | length 861.7
  Top Layer w25: U6.13 3045.87,2190.35 3090.55,2145.67 3090.55,1978.35 3120.08,1948.82 R39.2
  Top Layer w39.37: R39.2 R31.1 3267.72,1850.39 3320.28,1797.83 Q17.1
LC_DRV18: Q18.1 R32.1 R40.2 U6.12 | length 1210.1
  Top Layer w25: U6.12 2987.6,2140.35 3041.34,2086.61 3041.34,1584.65 3110.24,1515.75 R40.2
  Top Layer w39.37: R40.2 R32.1 3257.87,1417.32 3307.36,1367.83 Q18.1
LC_DRV19: Q19.1 R33.1 R41.2 U6.11 | length 1614.3
  Top Layer w25: U6.11 2958.86,2090.35 3001.97,2047.24 3001.97,1141.73 3080.71,1062.99 R41.2
  Top Layer w39.37: R41.2 R33.1 3267.72,964.57 3319.45,912.83 Q19.1
LC_DRV20: Q20.1 R35.1 R42.2 U6.10 | length 1962.4
  Top Layer w25: U6.10 2920.28,2040.35 2966.97,1993.66 2966.97,1043.02 3051.18,958.81 3051.18,688.98 3120.08,620.08 R42.2
  Top Layer w39.37: R42.2 R35.1 3267.72,521.65 3321.54,467.83 Q20.1
LED1: D20.2 U2.22 | length 428.8
  Top Layer w15: U2.22 2178.32,1299.21 2303.15,1299.21 2342.52,1338.58 D20.2
NetC1_1: C1.1 C2.2 D5.2 U1.1 | length 707.8
  Top Layer w40: U1.1 1675.2,844.49 1694.88,824.8 C2.2 1694.88,277.56 C1.1 ; 1710.63,809.06 D5.2
NetD1_1: D1.1 P4.2 Q1.3 | length 445.9
  Top Layer w39.37: P4.2 1680,3609.13 1641.73,3570.87 D1.1 1641.73,3415.75 Q1.3
NetD2_1: D2.1 P5.2 Q2.3 | length 445.1
  Top Layer w39.37: P5.2 1245,3607.2 1208.66,3570.87 D2.1 1208.66,3415.75 Q2.3
NetD3_1: D3.1 P6.2 Q3.3 | length 446.4
  Top Layer w39.37: P6.2 815,3620.12 775.59,3580.71 D3.1 775.59,3415.75 Q3.3
NetD4_1: D4.1 P7.2 Q4.3 | length 449.9
  Top Layer w39.37: P7.2 395,3623.35 352.36,3580.71 D4.1 352.36,3418.74 Q4.3
NetD6_1: D6.1 P9.2 Q5.3 | length 508.2
  Top Layer w39.37: P9.2 220.08,2722.83 257.87,2685.04 D6.1 491.73,2685.04 Q5.3
NetD7_1: D7.1 P8.2 Q6.3 | length 513.6
  Top Layer w39.37: P8.2 236.69,2292.83 277.56,2251.97 D7.1 481.89,2251.97 Q6.3
NetD8_1: D8.1 P10.2 Q7.3 | length 497
  Top Layer w39.37: P10.2 219.09,1847.83 257.87,1809.06 D8.1 480.43,1809.06 Q7.3
NetD9_1: D9.1 P11.2 Q8.3 | length 491.4
  Top Layer w39.37: P11.2 225.87,1417.83 257.87,1385.83 D9.1 487.2,1385.83 Q8.3
NetD10_1: D10.1 P12.2 Q9.3 | length 495.7
  Top Layer w39.37: P12.2 223.27,957.83 257.87,923.23 D10.1 479.61,923.23 Q9.3
NetD11_1: D11.1 P13.2 Q10.3 | length 498.3
  Top Layer w39.37: P13.2 220.35,517.83 257.87,480.31 D11.1 481.89,480.31 Q10.3
NetD12_1: D12.1 P14.2 Q11.3 | length 440.7
  Top Layer w39.37: P14.2 2120,3616.06 2084.65,3580.71 D12.1 2084.65,3405.91 Q11.3
NetD13_2: D13.2 R23.2 | length 100.4
  Top Layer w40: D13.2 R23.2
NetD14_1: D14.1 P15.2 Q12.3 | length 439.4
  Top Layer w39.37: P15.2 2550,3612.99 2517.72,3580.71 D14.1 2517.72,3405.91 Q12.3
NetD15_1: D15.1 P16.2 Q13.3 | length 440.2
  Top Layer w39.37: P16.2 2985,3614.92 2950.79,3580.71 D15.1 2950.79,3405.91 Q13.3
NetD16_1: D16.1 P17.2 Q14.3 | length 441
  Top Layer w39.37: P17.2 3420,3607.01 3383.86,3570.87 D16.1 3383.86,3405.91 Q14.3
NetD17_1: D17.1 P18.2 Q15.3 | length 470.3
  Top Layer w39.37: Q15.3 3459.57,2856.3 D17.1 3669.29,2856.3 3702.76,2822.83 P18.2
NetD18_1: D18.1 P19.2 Q16.3 | length 476.9
  Top Layer w39.37: Q16.3 3461.5,2423.23 D18.1 3669.29,2423.23 3699.69,2392.83 P19.2
NetD19_1: D19.1 P20.2 Q17.3 | length 476.5
  Top Layer w39.37: Q17.3 3458.58,1980.32 D19.1 3669.29,1980.32 3701.77,1947.83 P20.2
NetD20_1: D20.1 R34.1 | length 110.2
  Top Layer w15: D20.1 R34.1
NetD21_1: D21.1 P21.2 Q18.3 | length 487.1
  Top Layer w39.37: Q18.3 3460.35,1557.09 D21.1 3669.29,1557.09 3708.54,1517.83 P21.2
NetD22_1: D22.1 P22.2 Q19.3 | length 482.9
  Top Layer w39.37: Q19.3 3452.76,1094.49 D22.1 3669.29,1094.49 3705.94,1057.83 P22.2
NetD23_1: D23.1 P23.2 Q20.3 | length 482.6
  Top Layer w39.37: Q20.3 3454.84,651.57 D23.1 3669.29,651.57 3703.03,617.83 P23.2
RS485: U2.21 U3.2 U3.3 | length 630.7
  Top Layer w12: U2.21 2173.15,1259.84 v1(2234.25,1259.84) ; v1(2234,1137.2) U3.2 U3.3
  Bottom Layer w12: v1@2234.25,1137 v1(2234.25,1259.84)
RXD: U2.19 U3.1 | length 522.4
  Top Layer w12: U2.19 2156.7,1187.2 U3.1 U3.1@2521.46,1181.1
RXD2: P3.3 U2.13 | length 2410.1
  Top Layer w15: v2(1769,910) 1769,1213.2 U2.13
  Bottom Layer w20: v2(1769,910) 1798,881 2900,881 3064,717 3064,407 P3.3
TXD: U2.20 U3.4 | length 677.2
  Top Layer w12: U2.20 v1(2158.13,1230.32) ; v1@2158.13,1037.2 U3.4
  Bottom Layer w12: v1(2158.13,1036) v1(2158.13,1230.32)
TXD2: P3.2 U2.14 | length 2404
  Top Layer w15: v2(1819,935) 1819,1218.66 U2.14
  Bottom Layer w20: v2@1820,936 2933,936 3126,743 3126,445 P3.2
VCC: C3.1 C4.1 D13.1 P3.4 R34.2 RP6.1 RP6.2 RP6.3 RP6.4 RP7.1 RP7.2 RP7.3 RP7.4 RP8.1 RP8.2 RP8.3 RP8.4 RP9.1 RP9.2 RP9.3 RP9.4 RP10.1 RP10.2 RP10.3 RP10.4 RP11.1 RP11.2 RP11.3 RP11.4 U1.3 U2.10 U3.8 | length 6909.4
  Top Layer w20: RP11.4 RP11.3 RP11.2 RP11.1 1271.65,809.06 1307.09,844.49 U1.3 ; D13.1 1429.13,1251.97 1496.06,1318.9 1741.07,1318.9 U2.10 ; RP9.4 RP9.3 RP9.2 RP9.1 RP7.4 RP7.3 RP7.2 RP7.1 RP10.4 RP10.3 RP10.2 RP10.1 RP8.4 RP8.3 RP8.2 RP8.1 RP6.4 RP6.3 RP6.2 RP6.1 ; U3.8 2728.35,1232.28 2775.59,1279.53 R34.2 2881.42,1338.58 2924,1296 2924,1005 3000,929 v3(3000,658)
  Top Layer w40: D13.1 1435.04,1007.87 U1.3 1435.04,716.54 1368.11,649.61 1368.11,492.13 1397.64,462.6 C3.1 1456.69,460.63 C4.1 1456.69,154.31 1496,115 3074,115 P3.4
  Bottom Layer w20: v1(1666,1319) v1(1666,1950) ; v3(3000,658) 3000,371 P3.4
pads on no net: U4.9 U5.4 U5.9 U5.13 U6.9

## Keep-outs
Keep-Out Layer:
  lines w10: 24,65 24,3818.9 3904,3818.9 3904,65 24,65

## Silkscreen, mask and mechanical layers (free items; w line width, h text height)
Mechanical 1:
  the board outline again, w10